# Altium PCB PCB.PcbDoc
Units mm, origin at the board's own origin, x right, y up, seen from the top; angles counter-clockwise.
Board outline 152.4 x 101.6 mm, 2 copper layers (Top Layer, Bottom Layer), stack 1.571 mm thick; 61 components, 43 nets, 193 pads, 0 vias.
Unrouted connection lines stored in the file: 150.
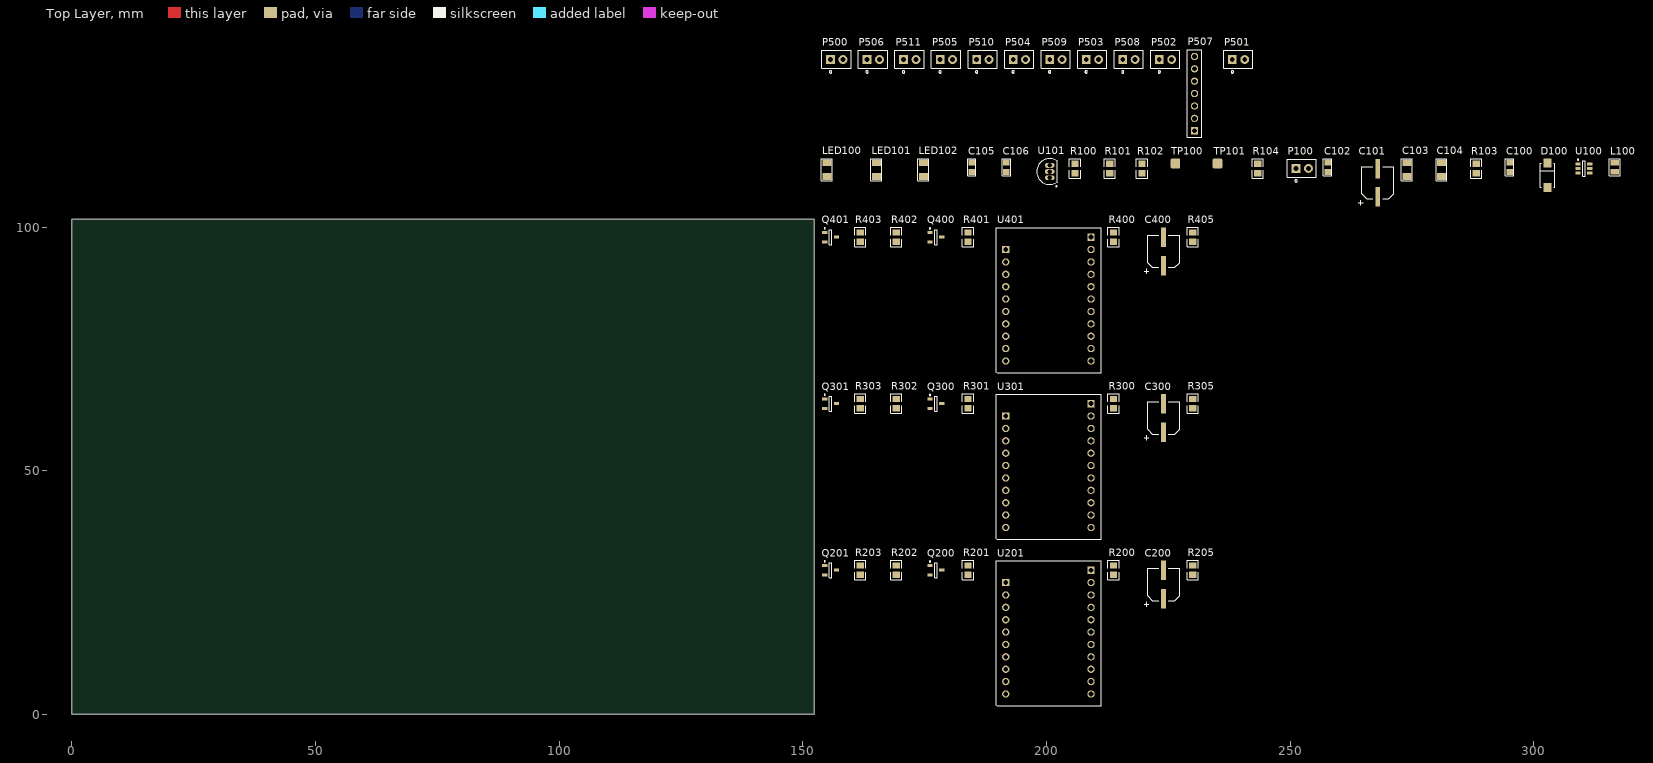
[diagram p0: Top Layer view]
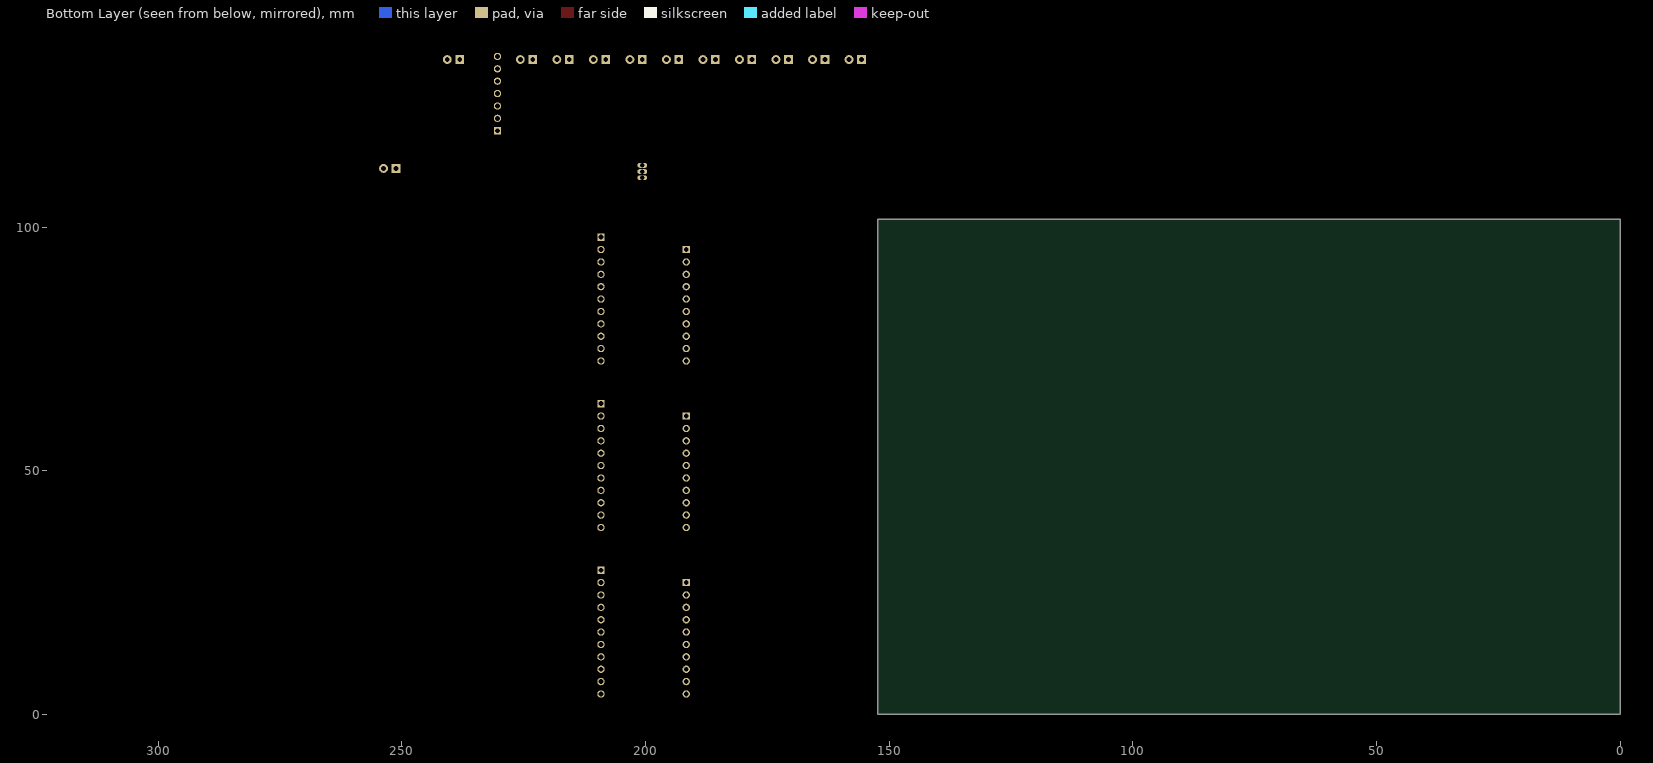
[diagram p1: Bottom Layer view, seen from below]

## Layer stack, top to bottom
Top Solder: solder mask 0.0102, Solder Resist, Dk 3.5
Top Layer: signal copper 0.035
Dielectric1: core 1.5, FR-4, Dk 4.2
Bottom Layer: signal copper 0.0356
Bottom Solder: solder mask 0.0102, Solder Resist, Dk 3.5

## Board outline
0,0 152.4,0 152.4,101.6 0,101.6

## Design rules (kind name [scope] priority, off if disabled: settings)
Clearance Polygon [InPolygon] p1: gap=0.508 ignorepadtopadclearanceinfootprint=FALSE except(0: Arc-Hole Track-Hole SMDPad-Hole THPad-Hole Via-Hole Fill-Hole Poly-Hole Region-Hole Text-Hole) // Polygon Clearance
Clearance [All] p2: gap=0.254 ignorepadtopadclearanceinfootprint=FALSE except(0: Arc-Hole Track-Hole SMDPad-Hole THPad-Hole Via-Hole Fill-Hole Poly-Hole Region-Hole Text-Hole)
FabricationTestPointUsage TestPointUsage [All] p1 off: valid=0 allowmultiple=FALSE
FabricationTestpoint Testpoint [All] p1 off: side=3 testpointundercomponent=TRUE minsize=1.016 maxsize=2.54 preferedsize=1.524 minholesize=0 maxholesize=1.016 preferedholesize=0.813 testpointgrid=0.025 allowsidetop=TRUE allowsidebottom=TRUE usegrid=TRUE gridtolerance=0
FanoutControl Fanout_BGA [IsBGA] p1 off: bgadir=Out bgaviamode=Centered fanoutstyle=Auto fanoutdirection=Alternating viagrid=0.025 // Fanout_BGA (Default Rule)
FanoutControl Fanout_LCC [IsLCC] p2 off: bgadir=Out bgaviamode=Centered fanoutstyle=Auto fanoutdirection=Alternating viagrid=0.025 // Fanout_LCC (Default Rule)
FanoutControl Fanout_SOIC [IsSOIC] p3 off: bgadir=Out bgaviamode=Centered fanoutstyle=Auto fanoutdirection=Alternating viagrid=0.025 // Fanout_SOIC (Default Rule)
FanoutControl Fanout_Small [(CompPinCount < 5)] p4 off: bgadir=Out bgaviamode=Centered fanoutstyle=Auto fanoutdirection=OutThenIn viagrid=0.025 // Fanout_Small (Default Rule)
FanoutControl Fanout_Default [All] p5 off: bgadir=Out bgaviamode=Centered fanoutstyle=Auto fanoutdirection=Alternating viagrid=0.025 // Fanout_Default (Default Rule)
Height [All] p1 off: minheight=0 maxheight=25.4 prefheight=12.7
HoleSize HoleType [IsPad And HasSquareHole] p1: absolutevalues=TRUE maxlimit=0 minlimit=0 maxpercent=80.000 minpercent=20.000 // Find Square Holes
HoleSize [All] p2: absolutevalues=TRUE maxlimit=5 minlimit=0.4 maxpercent=80.000 minpercent=20.000
LayerPairs [All] p1 off: enforce=TRUE
MinimumAnnularRing "Minimum Annular Ring" [All] p1: minimumring=0.2
PasteMaskExpansion [All] p1: expansion=0.05
PolygonConnect PolygonConnectVia [IsVia] p1: connectstyle=Direct reliefconductorwidth=0.254 reliefentries=4 polygonreliefangle="90 Angle" airgapwidth=0.254 // Direct Connect Via
PolygonConnect [All] p2: connectstyle=Relief reliefconductorwidth=0.508 reliefentries=4 polygonreliefangle="45 Angle" airgapwidth=0.254
RoomDefinition Uebersicht [InComponentClass('Uebersicht')] p1: confinementstyle=ConfineIn formatcopy=TRUE lockcomponents=FALSE outline 153.543,118.11 242.57,118.11 242.57,139.192 153.543,139.192
RoomDefinition "Spannungsversorgung: 12V, 5V, 3.3V" [InComponentClass('Spannungsversorgung: 12V, 5V, 3.3V')] p2: confinementstyle=ConfineIn formatcopy=TRUE lockcomponents=FALSE outline 153.543,103.886 321.437,103.886 321.437,116.84 153.543,116.84
RoomDefinition "Motor5: Vibbration    Motor6: Reserve" [InComponentClass('Motor5: Vibbration    Motor6: Reserve')] p3: confinementstyle=ConfineIn formatcopy=TRUE lockcomponents=FALSE outline 153.543,69.85 235.077,69.85 235.077,102.743 153.543,102.743
RoomDefinition "Motor3: Hubmechanismus    Motor3: Ausfahrmechanismus" [InComponentClass('Motor3: Hubmechanismus    Motor3: Ausfahrmechanismus')] p4: confinementstyle=ConfineIn formatcopy=TRUE lockcomponents=FALSE outline 153.543,35.687 235.077,35.687 235.077,68.58 153.543,68.58
RoomDefinition "Motor1: Fortbewegung    Motor2: Drehmechanismus" [InComponentClass('Motor1: Fortbewegung    Motor2: Drehmechanismus')] p5: confinementstyle=ConfineIn formatcopy=TRUE lockcomponents=FALSE outline 153.543,1.524 235.077,1.524 235.077,34.417 153.543,34.417
RoutingCorners [All] p1 off: cornerstyle=45-Degree minsetback=2.54 maxsetback=2.54
RoutingLayers [All] p1 off: top layer_v5=TRUE bottom layer_v5=TRUE
RoutingPriority [All] p1 off: routingpriority=0
RoutingTopology [All] p1 off: topology=Shortest
RoutingVias [All] p1: holewidth=0.4 width=0.8 viastyle="Through Hole" minholewidth=0.3 minwidth=0.7 maxholewidth=2 maxwidth=3.4
SignalStimulus "#Version Information" [All] p1 off: kind=1 level=0 starttime=10.00n stoptime=60.00n periodtime=100.00n // Version 0-9 from 2010-11-01
SilkToSolderMaskClearance SilkscreenOverComponentPads [IsPad] p1: minsilkscreentomaskgap=0.254 clearancetoexposedcopper=TRUE
SolderMaskExpansion [All] p1: expansion=0.05
Width [All] p1: maxlimit=2.54 minlimit=0.254 preferedwidth=0.254 minimp=50.000000 maximp=50.000000 favimp=50.000000
14 further rules are at their usual default settings.

## Classes and differential pairs
component class Uebersicht: P500 P501 P502 P503 P504 P505 P506 P507 P508 P509 P510 P511
component class "Spannungsversorgung: 12V, 5V, 3.3V": C100 C101 C102 C103 C104 C105 C106 C205 C206 D100 F100 L100 LED100 LED101 LED102 P100 R100 R101 R102 R103 R104 TP100 TP101 U100 U101
component class "Motor5: Vibbration    Motor6: Reserve": C400 Q400 Q401 R400 R401 R402 R403 R405 U401
component class "Motor3: Hubmechanismus    Motor3: Ausfahrmechanismus": C300 Q300 Q301 R300 R301 R302 R303 R305 U301
component class "Motor1: Fortbewegung    Motor2: Drehmechanismus": C200 Q200 Q201 R200 R201 R202 R203 R205 U201

## Components (designator, comment, footprint, x,y, rotation, side; value= is the part's Value field where it differs from the comment)
C100 "100nF" CAPC0805 295.021,112.268 r90 top value=100n
C101 "AVE476M16D16T-F" "CDE_CAP AVE CODE D_H" 267.97,109.093 r0 top value=10uF
C102 "100nF" CAPC0805 257.683,112.268 r90 top value=100n
C103 "22uF" CAPC1206 273.939,111.76 r90 top value=22u
C104 "22uF" CAPC1206 281.051,111.76 r90 top value=22u
C105 "1uF" CAPC0805 184.658,112.268 r90 top value=100n
C106 "1uF" CAPC0805 191.77,112.268 r90 top value=100n
C200 "AVE476M16D16T-F" "CDE_CAP AVE CODE D_H" 224.028,26.67 r0 top value=10uF
C300 "AVE476M16D16T-F" "CDE_CAP AVE CODE D_H" 224.028,60.833 r0 top value=10uF
C400 "AVE476M16D16T-F" "CDE_CAP AVE CODE D_H" 224.028,94.996 r0 top value=10uF
D100 "SK34SMA" DIOTEC_DO-214AC_1K2A_2_H 302.768,110.617 r90 top
L100 "CKP2016 4R7M-T" IND0806 316.611,112.268 r90 top
LED100 "LSR976" CAPC1206 154.94,111.76 r90 top
LED101 "LSR976" CAPC1206 165.1,111.76 r90 top
LED102 "LSR976" CAPC1206 174.752,111.76 r90 top
P100 "Stiftleiste 2 Pol" "2Pin Header 2.54mm" 251.206,112.014 r0 top
P500 "Stiftleiste 2 Pol" "2Pin Header 2.54mm" 155.702,134.366 r0 top
P501 "Stiftleiste 2 Pol" "2Pin Header 2.54mm" 238.125,134.366 r0 top
P502 "Stiftleiste 2 Pol" "2Pin Header 2.54mm" 223.139,134.366 r0 top
P503 "Stiftleiste 2 Pol" "2Pin Header 2.54mm" 208.153,134.366 r0 top
P504 "Stiftleiste 2 Pol" "2Pin Header 2.54mm" 193.167,134.366 r0 top
P505 "Stiftleiste 2 Pol" "2Pin Header 2.54mm" 178.181,134.366 r0 top
P506 "Stiftleiste 2 Pol" "2Pin Header 2.54mm" 163.195,134.366 r0 top
P507 "Stiftleiste 7 Pol" GEN_HEADER-2.54mm_7_H 230.378,119.761 r90 top
P508 "Stiftleiste 2 Pol" "2Pin Header 2.54mm" 215.646,134.366 r0 top
P509 "Stiftleiste 2 Pol" "2Pin Header 2.54mm" 200.66,134.366 r0 top
P510 "Stiftleiste 2 Pol" "2Pin Header 2.54mm" 185.674,134.366 r0 top
P511 "Stiftleiste 2 Pol" "2Pin Header 2.54mm" 170.688,134.366 r0 top
Q200 "Si2302CDS" SOT23-3 177.292,29.591 r0 top
Q201 "Si2302CDS" SOT23-3 155.702,29.591 r0 top
Q300 "Si2302CDS" SOT23-3 177.292,63.754 r0 top
Q301 "Si2302CDS" SOT23-3 155.702,63.754 r0 top
Q400 "Si2302CDS" SOT23-3 177.292,97.917 r0 top
Q401 "Si2302CDS" SOT23-3 155.702,97.917 r0 top
R100 "Generic" GEN_R0805_H 205.867,112.014 r90 top value=4.7k
R101 "Generic" GEN_R0805_H 212.979,112.014 r90 top value=1.5k
R102 "Generic" GEN_R0805_H 219.583,112.014 r90 top value=560
R103 "Generic" GEN_R0805_H 288.163,112.014 r90 top value=56k
R104 "Generic" GEN_R0805_H 243.332,112.014 r90 top value=10k
R200 "Generic" GEN_R0805_H 213.741,29.591 r90 top value=1k
R201 "Generic" GEN_R0805_H 183.896,29.591 r90 top value=10
R202 "Generic" GEN_R0805_H 169.164,29.591 r90 top value=1k
R203 "Generic" GEN_R0805_H 161.798,29.591 r90 top value=10
R205 "Generic" GEN_R0805_H 229.997,29.591 r90 top value=10k
R300 "Generic" GEN_R0805_H 213.741,63.754 r90 top value=1k
R301 "Generic" GEN_R0805_H 183.896,63.754 r90 top value=10
R302 "Generic" GEN_R0805_H 169.164,63.754 r90 top value=1k
R303 "Generic" GEN_R0805_H 161.798,63.754 r90 top value=10
R305 "Generic" GEN_R0805_H 229.997,63.754 r90 top value=10k
R400 "Generic" GEN_R0805_H 213.741,97.917 r90 top value=1k
R401 "Generic" GEN_R0805_H 183.896,97.917 r90 top value=10
R402 "Generic" GEN_R0805_H 169.164,97.917 r90 top value=1k
R403 "Generic" GEN_R0805_H 161.798,97.917 r90 top value=10
R405 "Generic" GEN_R0805_H 229.997,97.917 r90 top value=10k
TP100 "Testpoint xSmall" TP_SMD_xsmall 226.441,113.03 r90 top
TP101 "Testpoint xSmall" TP_SMD_xsmall 235.077,113.03 r90 top
U100 "TPS562209" SOT23-6 310.261,112.014 r0 top
U101 "LP38691DT-3.3" TO-92-TO3 200.66,111.379 r0 top
U201 "DRV8841Board" DRV8841_Board 191.643,27.051 r0 top
U301 "DRV8841Board" DRV8841_Board 191.643,61.214 r0 top
U401 "DRV8841Board" DRV8841_Board 191.643,95.377 r0 top

## Footprints (in the part's own frame and the unit in brackets; to place one, negate y for a bottom-side part, rotate by r counter-clockwise, add the part's x,y. Pads: shape width x height; smd on the part's side, far side on the other; paste and mask are expansions set on the pad)
"2Pin Header 2.54mm" [mm]
  rect 1.8x1.8 hole 1: 1(0,0)
  round 1.8 hole 1: 2(2.54,0)
  silkscreen extent -1.78,-2.79 4.19,1.91, body extent -1.27,-1.24 3.81,1.25, height 8.54
CAPC0805 [mm]
  rect 1.149x1.3 smd: 1(-0.975,0) 2(0.975,0)
  silkscreen extent -1.75,-0.86 1.75,0.86, body extent -1,-0.6 1,0.6, height 1.2
CAPC1206 [mm]
  rect 1.35x1.8 smd: 1(-1.4,0) 2(1.4,0)
  silkscreen extent -2.29,-1.12 2.29,1.12, body extent -1.6,-0.8 1.6,0.8, height 1.8
"CDE_CAP AVE CODE D_H" [mm]
  rect 1x4 smd paste-0.002 mask+0.07: 1(0,-2.9) 2(0,2.9)
  silkscreen extent -4,-4.6 3.29,3.3, body extent -3.31,-3.5 3.29,3.5
DIOTEC_DO-214AC_1K2A_2_H [mm]
  rect 1.8x1.6 smd: 1(2.5,0) 2(-2.5,0)
  silkscreen extent -2.5,-1.5 2.5,1.5
DRV8841_Board [mm]
  rect 1.5x1.5 hole 1: 11(0,0) 21(17.5,2.54)
  round 1.5 hole 1: 12(0,-2.54) 13(0,-5.08) 14(0,-7.62) 15(0,-10.16) 16(0,-12.7) 17(0,-15.24) 18(0,-17.78) 19(0,-20.32) 22(17.5,0) 23(17.5,-2.54) 24(17.5,-5.08) 25(17.5,-7.62) 26(17.5,-10.16) 27(17.5,-12.7) 28(17.5,-15.24) 29(17.5,-17.78) 110(0,-22.86) 210(17.5,-20.32) 211(17.5,-22.86)
  silkscreen extent -1.91,-25.27 19.56,4.44, body extent -1.52,-25.04 18.98,3.96, height 7.94
GEN_HEADER-2.54mm_7_H [mm]
  rect 1.5x1.5 hole 1 paste-0.002 mask+0.07: 1(0,0)
  round 1.5 hole 1 paste-0.002 mask+0.07: 2(2.54,0) 3(5.08,0) 4(7.62,0) 5(10.16,0) 6(12.7,0) 7(15.24,0)
  silkscreen extent -1.38,-1.5 16.62,1.5, body extent -1.38,-1.5 16.62,1.5, height 8
GEN_R0805_H [mm]
  rect 1.3x1.5 smd: 1(-0.95,0) 2(0.95,0)
  silkscreen extent -2,-1.15 2,1.15, body extent -1.15,-0.67 1.15,0.68, height 0.76
IND0806 [mm]
  rect 1.13x1.8 smd: 1(-0.965,0) 2(0.965,0)
  silkscreen extent -1.75,-1.12 1.75,1.12, body extent -1,-0.8 1,0.8, height 1
SOT23-3 [mm]
  rect 1.1x0.6 smd: 1(-1.2,0.95) 2(-1.2,-0.95) 3(1.2,0)
  silkscreen extent -1.32,-1.55 0.25,1.92, body extent -1.4,-1.45 1.4,1.45, height 1.3
SOT23-6 [mm]
  rect 1.1x0.6 smd: 1(-1.2,0.95) 2(-1.2,0) 3(-1.2,-0.95) 4(1.2,-0.95) 5(1.2,0) 6(1.2,0.95)
  silkscreen extent -1.32,-1.55 0.25,1.92, body extent -1.4,-1.45 1.4,1.45, height 1.45
TO-92-TO3 [mm] "TO, Flat Index; 3 In-Line, Axial Leads; Body Dia. 4.8mm; Leads 0.56 x 0.53 mm (max)"
  oval 2x1 hole 0.9: 1(0,-1.27) 2(0,0) 3(0,1.27)
  silkscreen extent -2.65,-3.13 1.52,2.65, body extent -2.65,-2.66 1.52,2.66, height 5.33
TP_SMD_xsmall [mm]
  rrect30% 2x2 smd: 1(0,0)

## Part data
C100 C102 C105 C106: library part "C Bipolar 0805", "X7R MLCC 0805 (2012 Metric)", Case-EIA=0805, Case-Metric=2012, Rated Voltage=50V, Temperature Characteristics EIA=X7R, Temperature Range EIA=-55C/+125C, Tolerance=10%
C101 C200 C300 C400: library part "CDE_AVE476M16D16T-F_AVE CODE D", "Aluminum Electrolytic Capacitors for Filtering and Bypass, 47uF, 16V", Distributor PartNr=598-AVE476M16D16T-F, Manufacturer="Cornell Dubilier", ValueAddon="16V ±20 %", #Class=PASSIVE, #ClassSub=CAPACITOR, ComponentLink1Description="Manufacturer Link", ComponentLink2Description=Datasheet, ComponentLink2URL=http://www.cde.com/catalogs/AVE.pdf, ComponentLink3Description="Packaging Specification", Distributor=Mouser, Manufacturer PartNr=AVE476M16D16T-F, Published=20121220, Publisher="Stefan Ursella, M.Eng", RefFootprint="CDE_CAP AVE CODE D", RefSchema="CDE_AVE476M16D16T-F_AVE CODE D"
C103 C104: library part "C Bipolar 1206", "X7R MLCC 1206 (3016 Metric)", Case-EIA=1206, Case-Metric=3216, Rated Voltage=10V, Temperature Characteristics EIA=X7R, Temperature Range EIA=-55C/+125C, Tolerance=10%
D100: library part DIOTEC_SK34SMA_DO-214AC, Distributor PartNr=600727, Manufacturer="Diotec Semiconductor", #Class=DIODE, #ClassSub=SCHOTTKY, ComponentLink1Description="Manufacturer Link", ComponentLink1URL=http://diotec.com/en/products/all-products/productlist.html?aid=SK34SMA, ComponentLink2Description=Datasheet, ComponentLink2URL=http://diotec.com/tl_files/diotec/files/pdf/datasheets/sk32sma.pdf, ComponentLink3Description="Packaging Specification", ComponentLink3URL=http://diotec.com/en/products/all-products/productlist.html?aid=SK34SMA, Distributor=Distrelec, Manufacturer PartNr=SK34SMA, Published=20121217, Publisher="Stefan Ursella, M.Eng", RefFootprint=DIOTEC_DO-214AC_1K2A_2_H, RefSchema=DIOTEC_SK34SMA_DO-214AC, Status=nLager
L100: library part L, "MULTILAYER CHIP POWER INDUCTORS", Current Rating=900mA, Inductance=4u7, Manufactor="Taiyo Yuden", ComponentLink1Description="Datasheet Taiyo Yuden CK Series", ComponentLink1URL=V:\Inductor\Taiyo_Yuden_CK_Series.pdf, DCR=160mOhm
LED100 LED101 LED102: library part OSR_LSR976_0805(1K2A), "Hyper ChipLED, Red,", Distributor PartNr=1226392, Manufacturer=OSRAM, #Class=DIODE, #ClassSub=LED, ComponentLink1Description="Manufacturer Link", ComponentLink1URL=http://www.osram-os.com/osram_os/en/products/product-catalog/led-light-emitting-diodes/chipled/chipled-0805/ls-r976/index.jsp?search_result=%2fosram_os%2fen%2fsearch%2fadvanced_search.jsp%3faction%3ddosearch%26inp_searchterm_1%3dLS%2bR976%26website_name%3dosram_os_en, ComponentLink2Description=Datasheet, ComponentLink2URL=http://catalog.osram-os.com/catalogue/catalogue.do;jsessionid=8A0FA5146E77D3A917A5A5D383CD44B4?act=downloadFile&favOid=0200000600039319000100b6, ComponentLink3Description="Packaging Specification", ComponentLink3URL=http://catalog.osram-os.com/catalogue/catalogue.do;jsessionid=8A0FA5146E77D3A917A5A5D383CD44B4?act=downloadFile&favOid=0200000600039319000100b6, Distributor=Farnell, Manufacturer PartNr=LSR976, Published=20121218, Publisher="Stefan Ursella, M.Eng", RefFootprint=GEN_LED0805_1K2A_2_H, RefSchema=OSR_LSR976_0805(1K2A)
P100: library part "2 Pin Connector"
P500 P501 P502 P503 P504 P505 P506 P508 P509 P510 P511: library part "2 Pin Connector", "2 Pin Header 2.54mm"
P507: library part GEN_HEADER_7, "generic Header, 7-Pin", Distributor PartNr=tbd, #Class=CONNECTOR, #ClassSub=HEADER, ComponentLink1Description="Manufacturer Link", ComponentLink2Description=Datasheet, ComponentLink3Description="Packaging Specification", Distributor=tbd, Manufacturer=tbd, Manufacturer PartNr=tbd, Published=20121218, Publisher="Altium Limited", RefFootprint=GEN_HEADER-2.54mm_7_H, RefSchema=GEN_HEADER_7
Q200 Q201 Q300 Q301 Q400 Q401: library part "Depletion Mode MOSFET", "N-Channel 20V (D-S) MOSFET", ComponentLink1Description="Datasheet Si2302CDS", ComponentLink1URL=V:\MosFets\si2302cds.pdf, ID=2.9A, RDSON=57mR, VDSS=20V
R100 R101 R102 R103 R104 R200 R201 R202 R203 R205 R300 R301 R302 R303 R305 R400 R401 R402 R403 R405: library part GEN_R_2, "generic resistor", Distributor PartNr=tbd, Manufacturer=Tbd, #Class=PASSIVE, #ClassSub=RESISTOR, ComponentLink1Description="Manufacturer Link", ComponentLink2Description=Datasheet, ComponentLink3Description="Packaging Specification", Distributor=tbd, Manufacturer PartNr=tbd, Published=8-Jun-2000, Publisher="Altium Limited", RefFootprint=GEN_R0805_H, RefSchema=GEN_R_2
TP100 TP101: library part "Testpoint small", Type="Standard (No BOM)"
U100: "3-A Synchronous Step-Down Voltage Regulator", Manufactor="Texas Instruments", ComponentLink1Description="Datasheet TPS56x209", ComponentLink1URL=V:\Power_Management_ICs\PWM_Cont\TPS56x209.pdf, Order Nr.=TPS562209DDCR
U101: library part MCP1700-1202E/TO, "Low Quiescent Current LDO, 3-Pin TO-92, Extended TemperatureBAG", Supplier Part Number 1=MCP1700-1202E/TO-ND, ComponentLink1Description=Datasheet, ComponentLink1URL=http://ww1.microchip.com/downloads/en/DeviceDoc/21826b.pdf, ComponentLink2Description="Packaging Specification", ComponentLink2URL=http://www.microchip.com/stellent/groups/techpub_sg/documents/packagingspec/en012702.pdf, ComponentLink3Description="Microchip.com Home", ComponentLink3URL=http://www.microchip.com/, DatasheetVersion="revB, Feb-2007", PackageDescription="3-Lead Plastic Transistor Outline (TO) [TO-92]", PackageReference=TO-92-TO3, PackageVersion="revBB, Aug-2009", Published=29-Jan-2009, Publisher="Altium Limited", Supplier 1=Digi-Key
U201 U301 U401: library part DRV8841_Board

## Nets (pads, with @x,y where several pads share a name; then routed paths per layer and width w, separated by ;. In a path a pad name is that pad's centre, name@x,y a point inside that pad or via, vN(x,y) a via of type N, cw(c..) or ccw(c..) an arc to the next point about the centre after c; other vN are vias at no path point)
3.3V: C106.1 P510.1 P510.2 R102.2 TP101.1 U101.3
5V: C105.1 P100.1 P509.1 P509.2 R101.2 R200.2 R202.2 R300.2 R302.2 R400.2 R402.2 TP100.1 U101.2 U201.210 U301.210 U401.210
12V: C101.1 C102.1 C200.1 C300.1 C400.1 D100.1 P508.1 P508.2 R100.2 U100.3 U100.5 U201.11 U201.13 U201.110 U301.11 U301.13 U301.110 U401.11 U401.13 U401.110
GND: C101.2 C102.2 C103.1 C104.2 C105.2 C106.2 C200.2 C300.2 C400.2 LED100.1 LED101.1 LED102.1 P500.1 P511.1 P511.2 Q200.2 Q201.2 Q300.2 Q301.2 Q400.2 Q401.2 R104.1 R205.2 R305.2 R405.2 U100.1 U101.1 U201.12 U201.15 U201.18 U201.21 U201.23 U201.25 U201.27 U201.29 U301.12 U301.15 U301.18 U301.21 U301.23 U301.25 U301.27 U301.29 U401.12 U401.15 U401.18 U401.21 U401.23 U401.25 U401.27 U401.29
NetC100_1: C100.1 U100.6
NetC100_2: C100.2 L100.1 U100.2
NetC103_2: C103.2 C104.1 L100.2 P100.2 R103.2
NetD100_2: D100.2 P500.2
NetLED100_2: LED100.2 R100.1
NetLED101_2: LED101.2 R101.1
NetLED102_2: LED102.2 R102.1
NetP501_1: P501.1 U201.14
NetP501_2: P501.2 U201.16
NetP502_1: P502.1 U201.19
NetP502_2: P502.2 U201.17
NetP503_1: P503.1 U301.14
NetP503_2: P503.2 U301.16
NetP504_1: P504.1 U301.19
NetP504_2: P504.2 U301.17
NetP505_1: P505.1 U401.14
NetP505_2: P505.2 U401.16
NetP506_1: P506.1 U401.19
NetP506_2: P506.2 U401.17
NetQ200_1: Q200.1 R201.2
NetQ200_3: Q200.3 R200.1 U201.26
NetQ201_1: Q201.1 R203.2
NetQ201_3: Q201.3 R202.1 U201.22
NetQ300_1: Q300.1 R301.2
NetQ300_3: Q300.3 R300.1 U301.26
NetQ301_1: Q301.1 R303.2
NetQ301_3: Q301.3 R302.1 U301.22
NetQ400_1: Q400.1 R401.2
NetQ400_3: Q400.3 R400.1 U401.26
NetQ401_1: Q401.1 R403.2
NetQ401_3: Q401.3 R402.1 U401.22
NetR103_1: R103.1 R104.2 U100.4
nSleep: P507.7 R205.1 R305.1 R405.1 U201.211 U301.211 U401.211
PWM_Motor1: P507.1 R201.1 U201.28
PWM_Motor2: P507.2 R203.1 U201.24
PWM_Motor3: P507.3 R301.1 U301.28
PWM_Motor4: P507.4 R303.1 U301.24
PWM_Motor5: P507.5 R401.1 U401.28
PWM_Motor6: P507.6 R403.1 U401.24